# Altium PCB BottomBoard.PcbDoc (part 1 of 2)
Units mm, origin at the board's own origin, x right, y up, seen from the top; angles counter-clockwise.
Board outline 200 x 100 mm, 4 copper layers (Top Layer, Internal Plane 1, Internal Plane 2, Bottom Layer), stack 0.462 mm thick; 152 components, 162 nets, 488 pads, 15 vias.
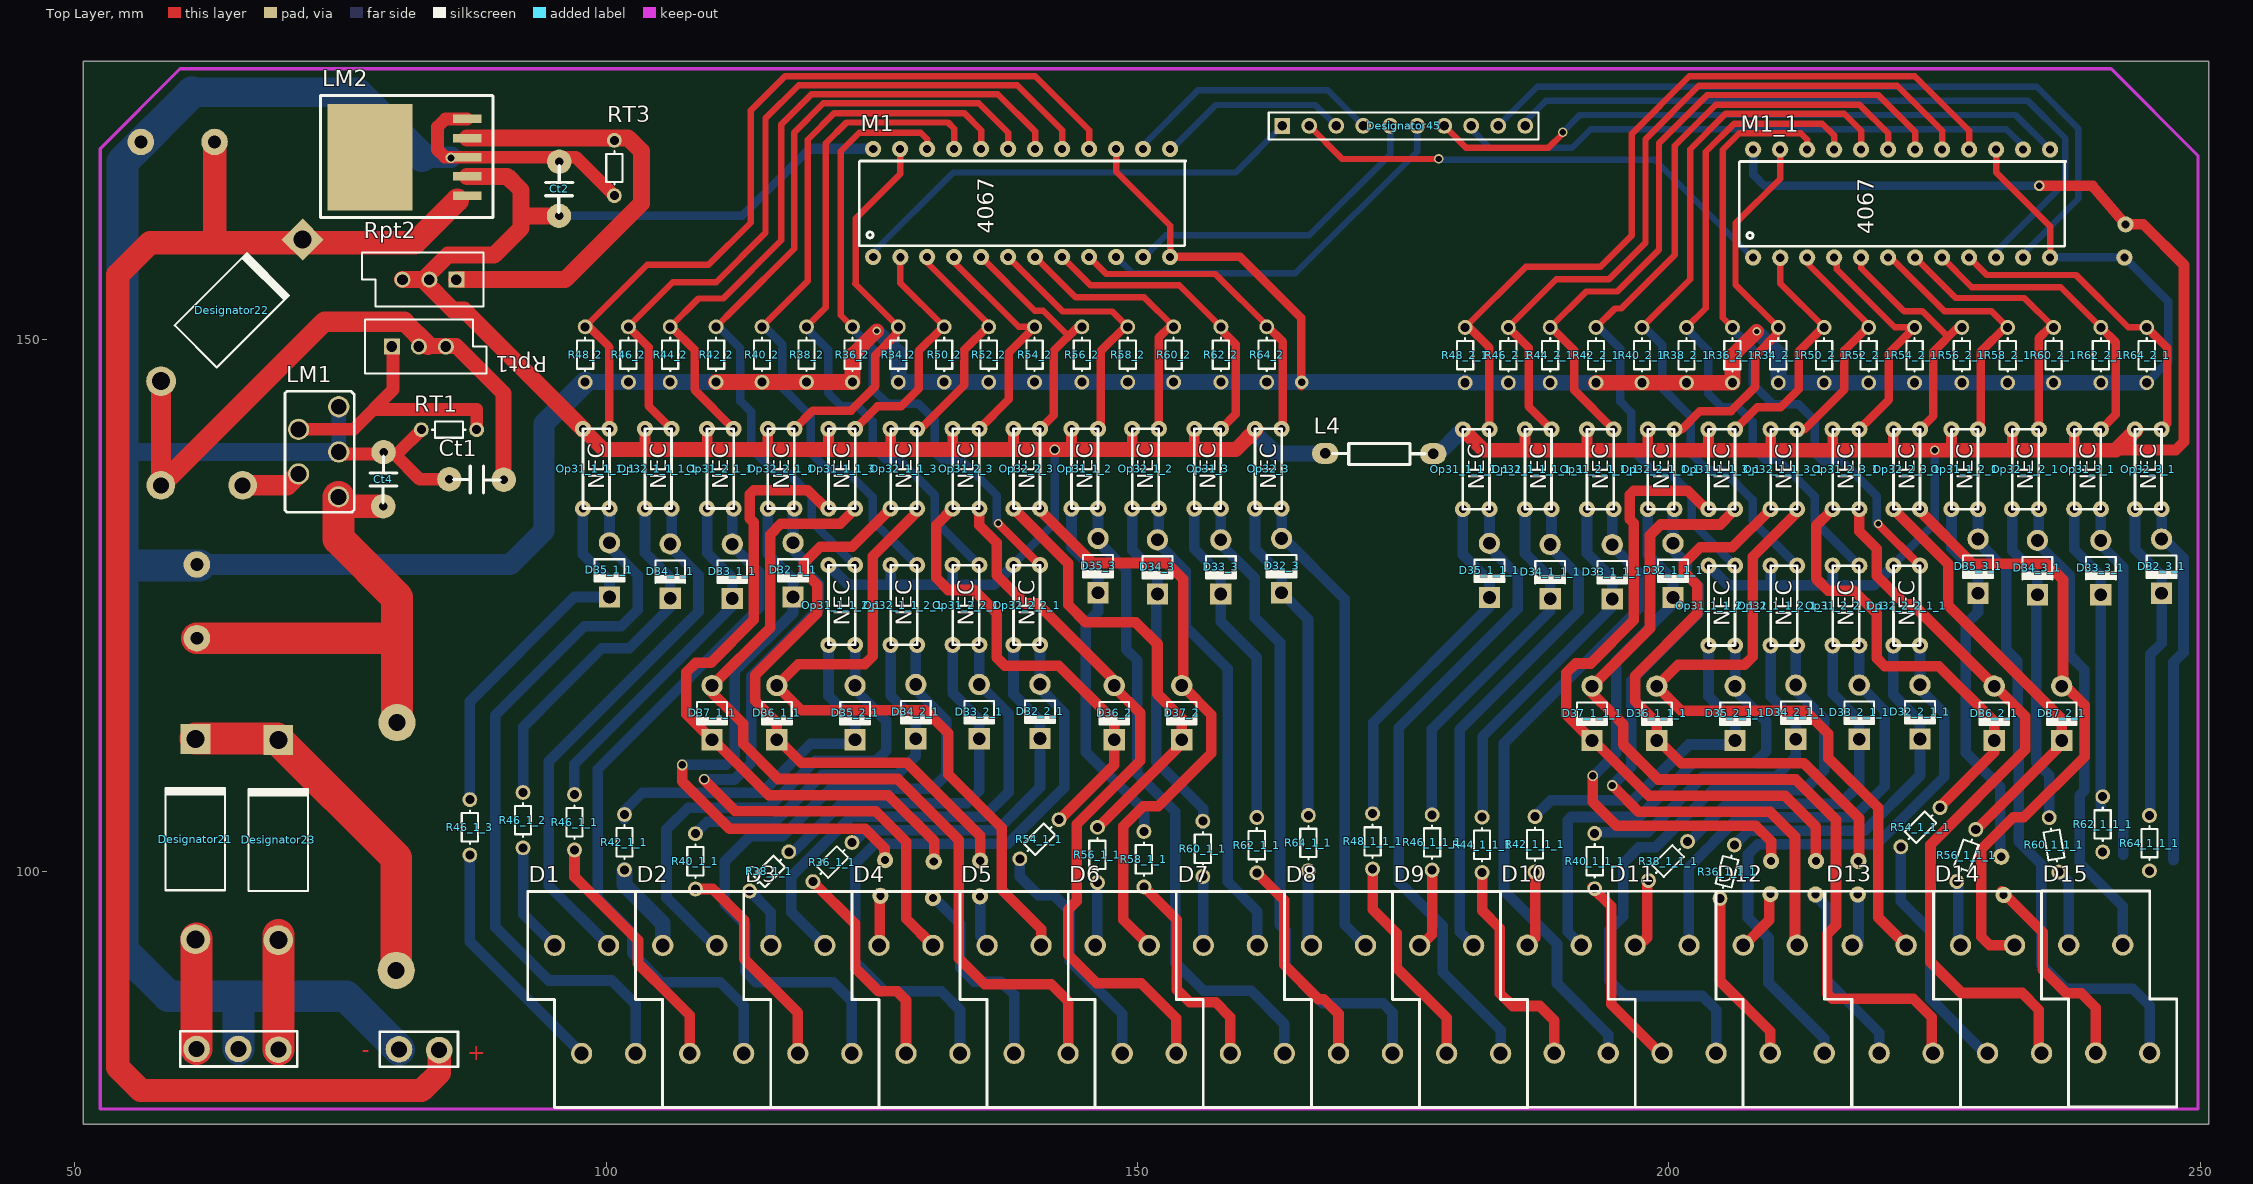
[diagram p0: Top Layer view]
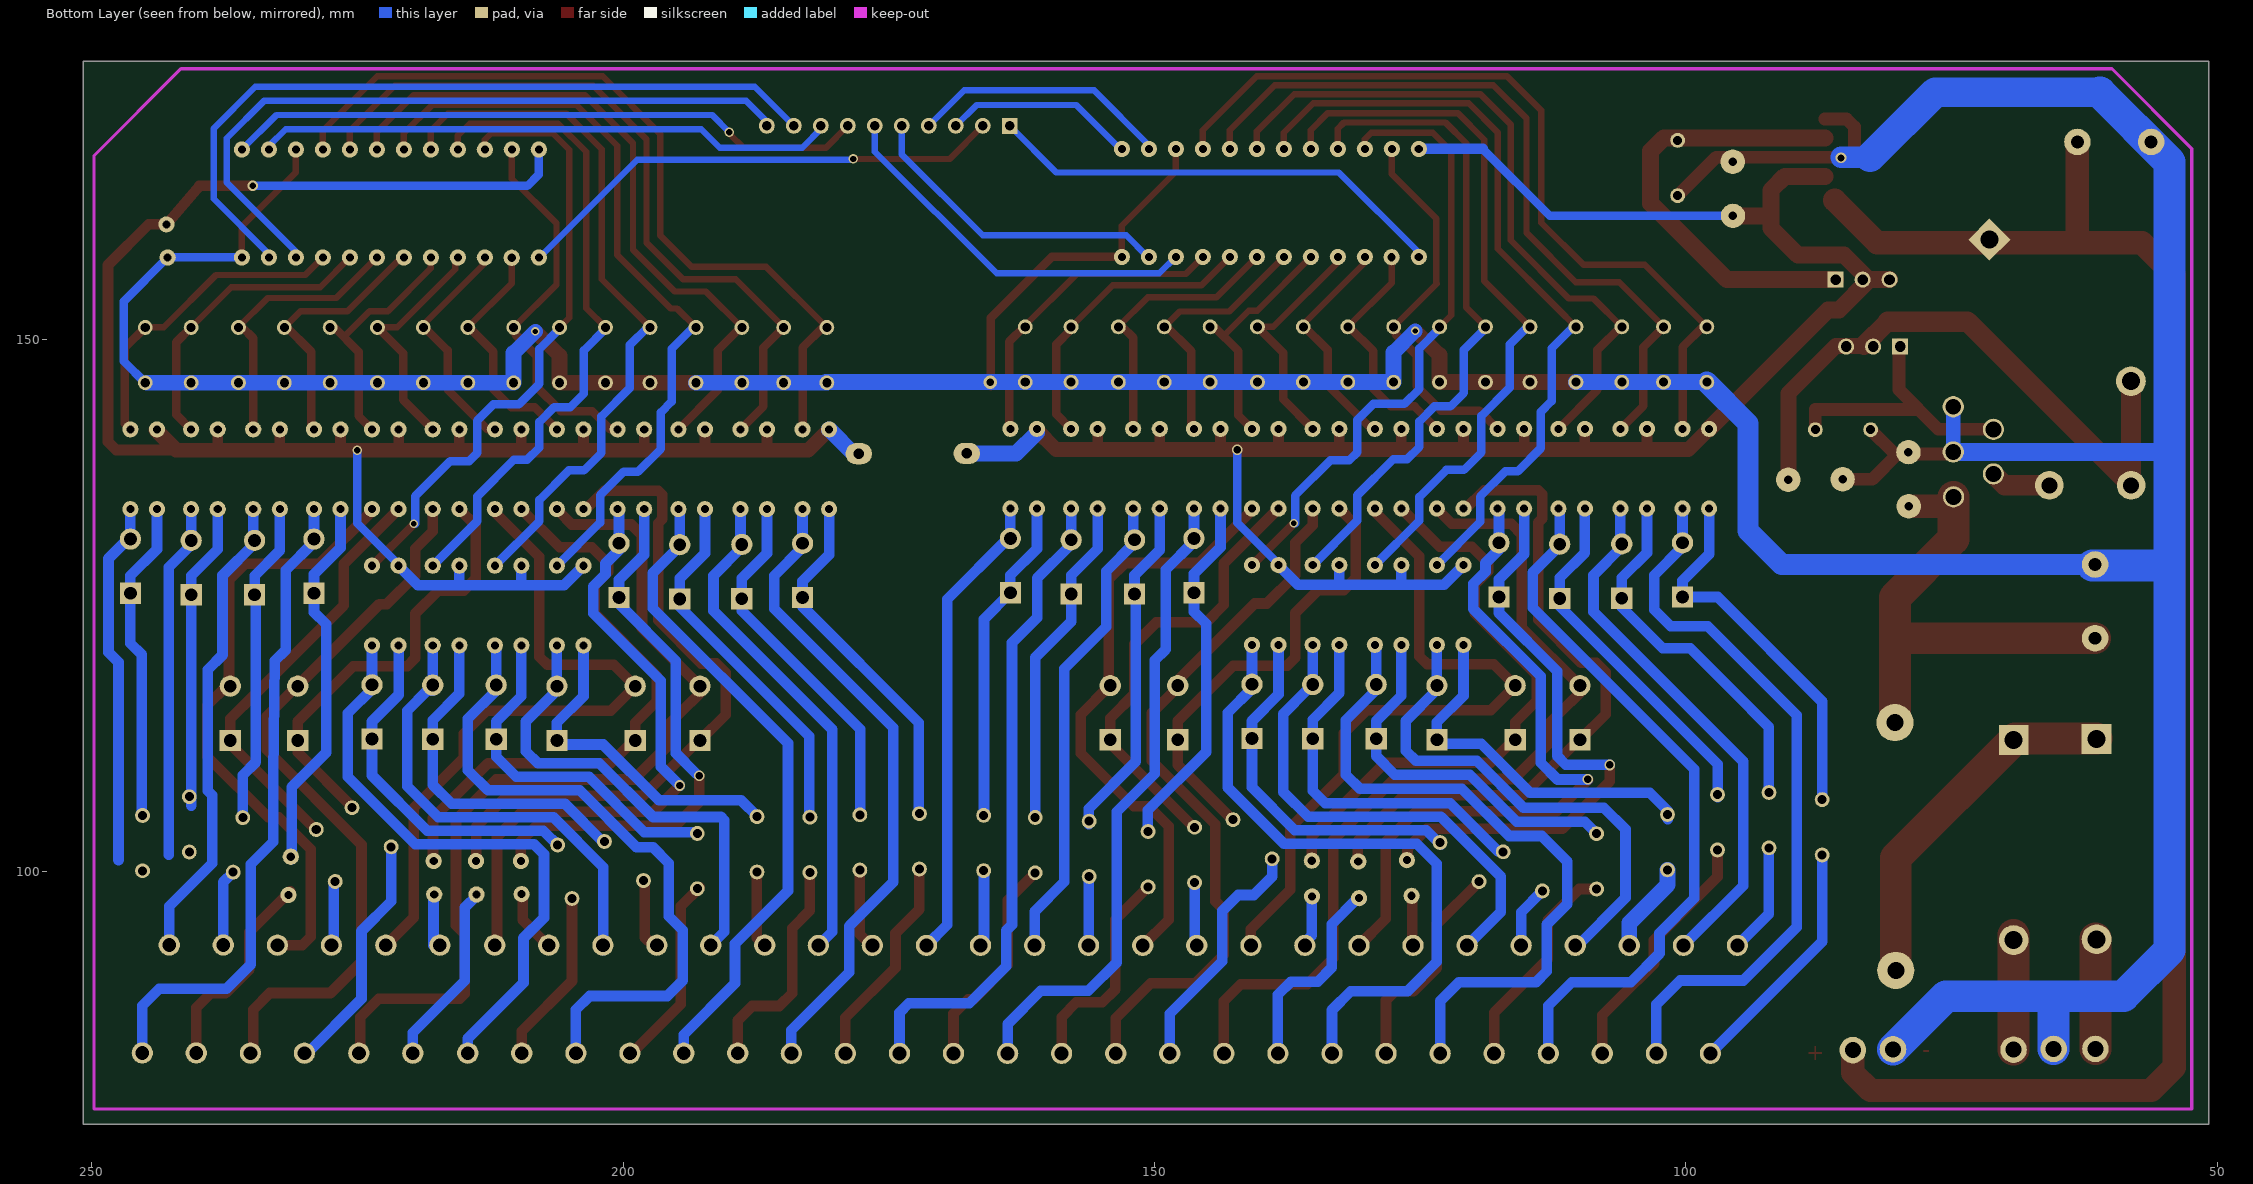
[diagram p1: Bottom Layer view, seen from below]
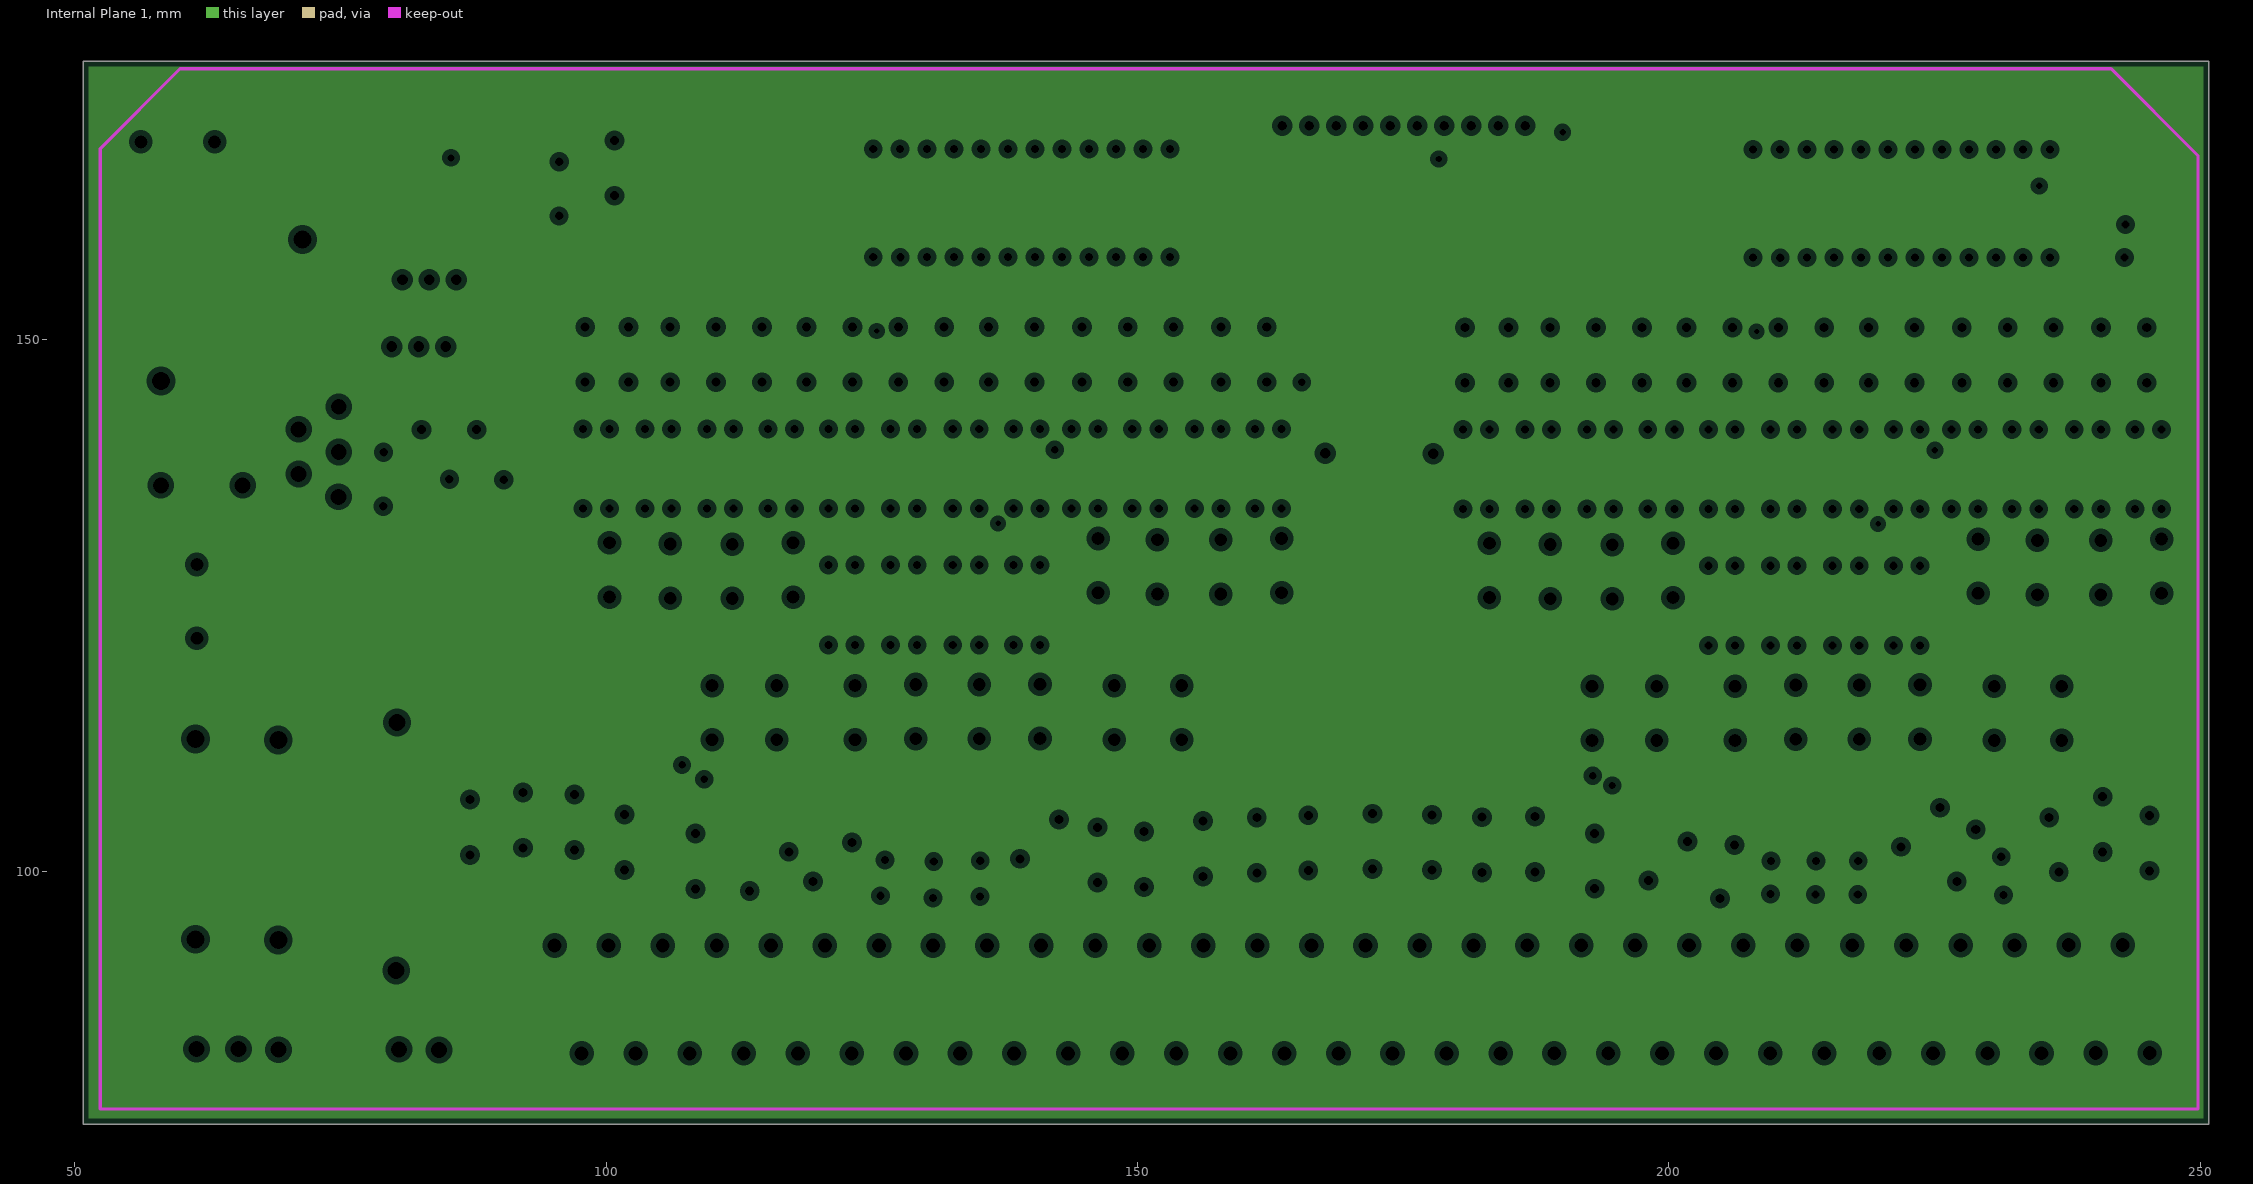
[diagram p2: Internal Plane 1, clearances drawn from the general rule]
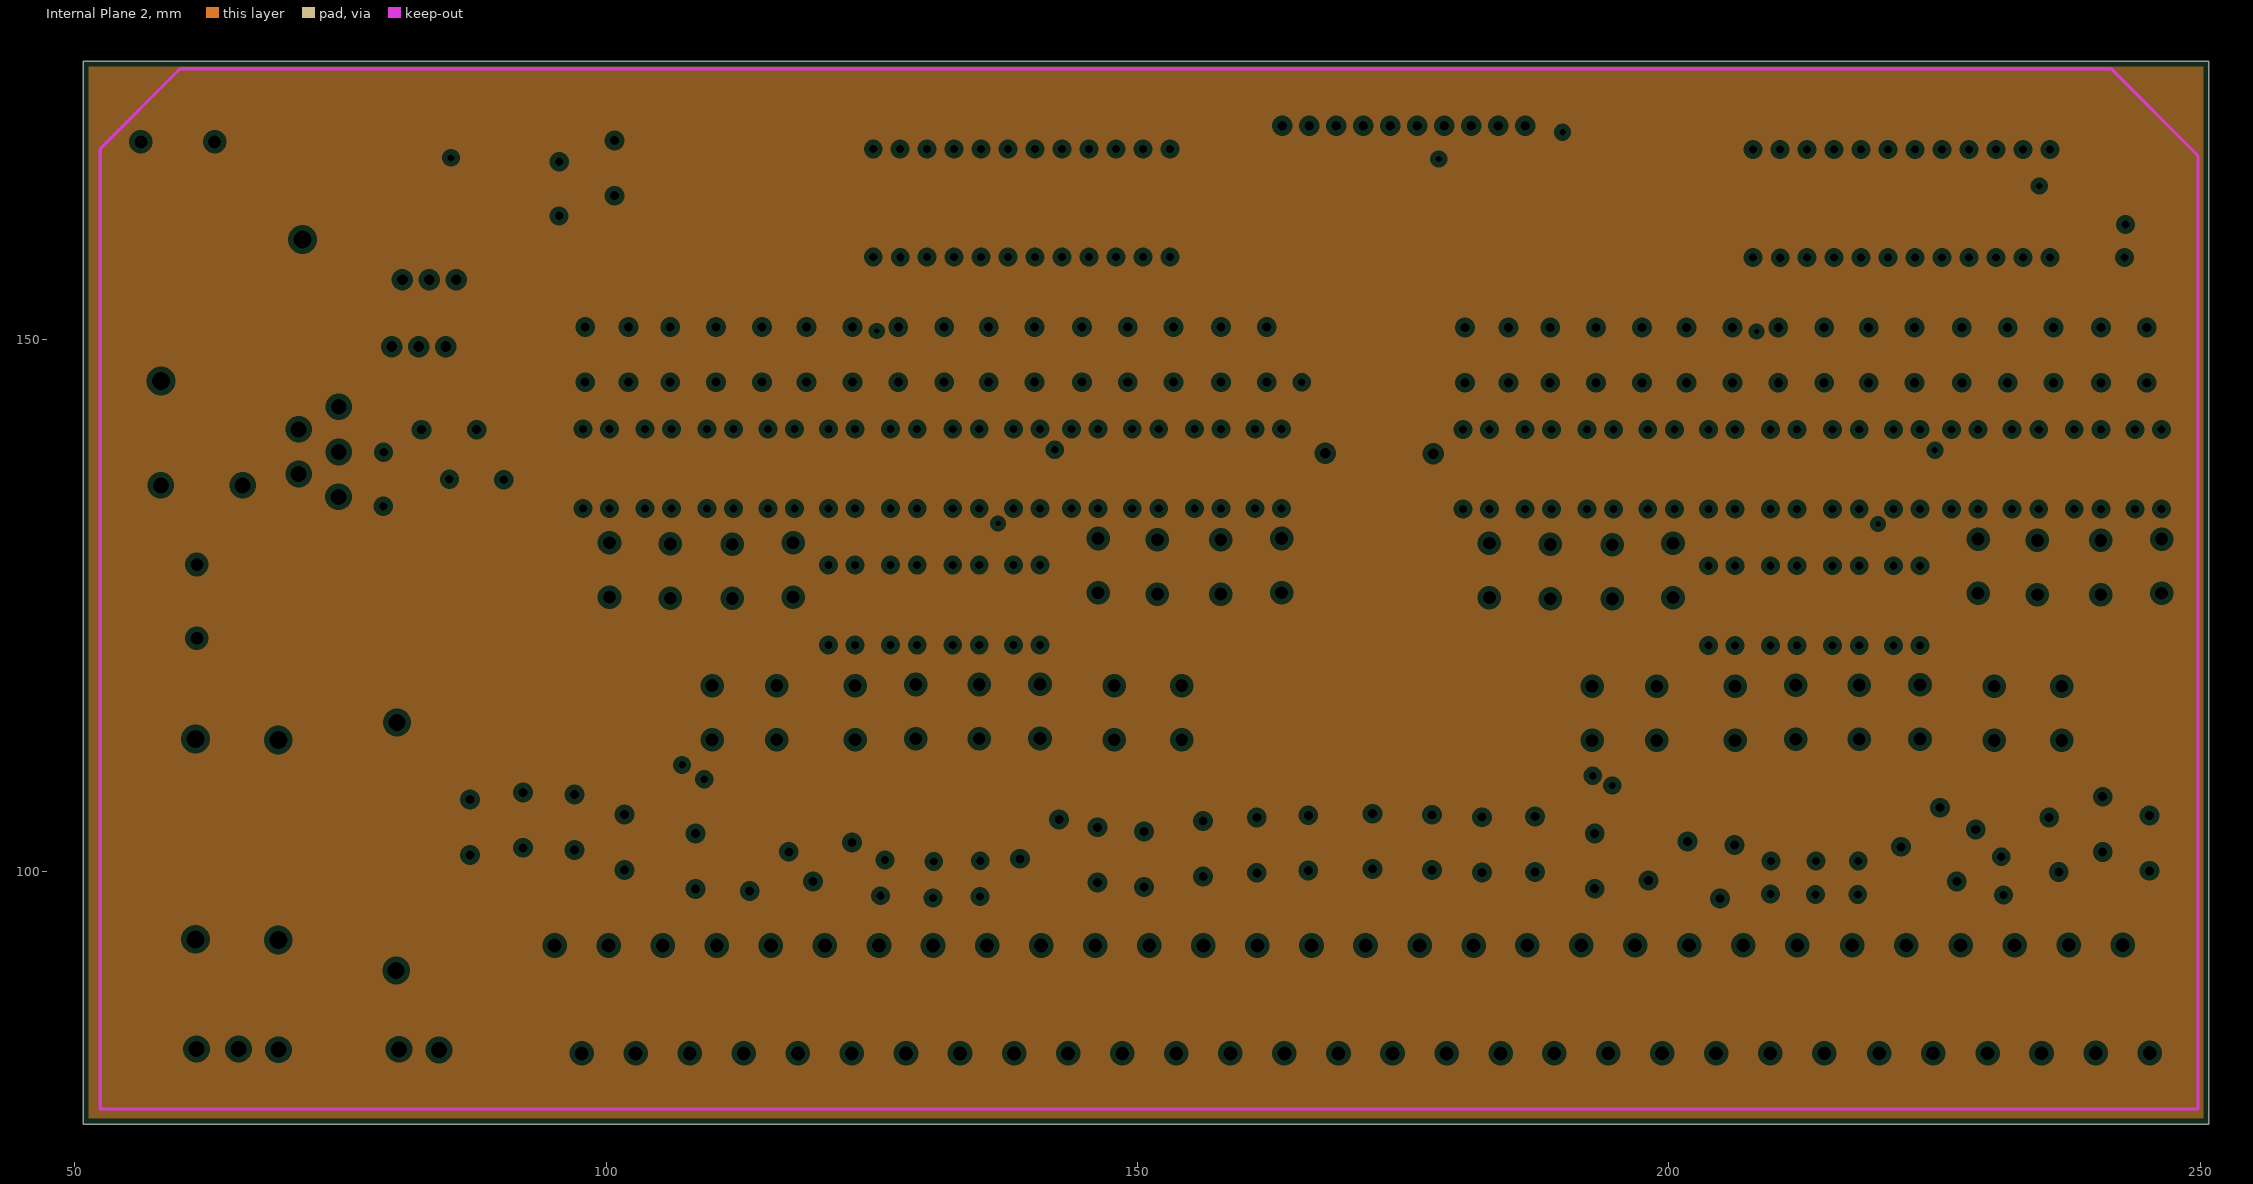
[diagram p3: Internal Plane 2, clearances drawn from the general rule]

## Layer stack, top to bottom
Top Solder: solder mask 0.0102, Solder Resist, Dk 3.5
Top Layer: signal copper 0.0356
Internal Plane 1: plane copper 0.0356
Internal Plane 2: plane copper 0.0356
Dielectric 1: dielectric 0.32, FR-4, Dk 4.8
Bottom Layer: signal copper 0.0356
Bottom Solder: solder mask 0.0102, Solder Resist, Dk 3.5

## Board outline
50.8,76.2 250.8,76.2 250.8,176.2 50.8,176.2

## Design rules (kind name [scope] priority, off if disabled: settings)
Clearance [All] p1: gap=0.2 ignorepadtopadclearanceinfootprint=FALSE
PlaneClearance [All] p1: clearance=0.508
PlaneConnect [All] p1: planeconnectstyle=Relief reliefexpansion=0.508 reliefentries=4 reliefconductorwidth=0.254 reliefairgap=0.254
PolygonConnect [All] p1: connectstyle=Relief reliefconductorwidth=0.254 reliefentries=4 polygonreliefangle="90 Angle" airgapwidth=0.254
RoutingVias [All] p1: holewidth=0.6 width=1 viastyle="Through Hole" minholewidth=0.711 minwidth=1.27 maxholewidth=0.711 maxwidth=1.27
SolderMaskExpansion [All] p1: expansion=0.102
Width [All] p1: maxlimit=0.2 minlimit=0.2 preferedwidth=0.2
28 further rules are at their usual default settings.

## Classes and differential pairs
component class MCU: Y1
component class GSM: C1 C2 R313 R323 RG1 RG2 RG3

## Components (designator, comment, footprint, x,y, rotation, side; value= is the part's Value field where it differs from the comment)
Ct1 "22pF" RAD_ADA 90.358,136.833 r180 top
Ct2 "22pF" RAD_ADA 95.565,161.649 r90 top
Ct4 "22pF" RAD_ADA 79.029,134.319 r90 top (schematic designator Ct2)
D1 "Comment" "Conector 4 Pin" 95.15,93 r0 top
D2 "Comment" "Conector 4 Pin" 105.325,93 r0 top
D3 "Comment" "Conector 4 Pin" 115.5,93 r0 top
D4 "Comment" "Conector 4 Pin" 125.675,93 r0 top
D5 "Comment" "Conector 4 Pin" 135.85,93 r0 top
D6 "Comment" "Conector 4 Pin" 146.025,93 r0 top
D7 "Comment" "Conector 4 Pin" 156.2,93 r0 top
D8 "Comment" "Conector 4 Pin" 166.375,93 r0 top
D9 "Comment" "Conector 4 Pin" 176.55,93 r0 top
D10 "Comment" "Conector 4 Pin" 186.675,93.025 r0 top
D11 "Comment" "Conector 4 Pin" 196.825,93.025 r0 top
D12 "Comment" "Conector 4 Pin" 207,93.025 r0 top
D13 "Comment" "Conector 4 Pin" 217.25,93.025 r0 top
D14 "Comment" "Conector 4 Pin" 227.45,93.025 r0 top
D15 "Comment" "Conector 4 Pin" 237.627,93.044 r0 top
D32_1_1 "Diode 1N4007 vertical" "D 50mm" 117.586,125.66 r270 top (schematic designator D32)
D32_1_1_1 "Diode 1N4007 vertical" "D 50mm" 200.39,125.609 r270 top (schematic designator D32)
D32_2_1 "Diode 1N4007 vertical" "D 50mm" 140.827,112.348 r270 top (schematic designator D32)
D32_2_1_1 "Diode 1N4007 vertical" "D 50mm" 223.631,112.297 r270 top (schematic designator D32)
D32_3 "Diode 1N4007 vertical" "D 50mm" 163.56,126.064 r270 top (schematic designator D32)
D32_3_1 "Diode 1N4007 vertical" "D 50mm" 246.364,126.013 r270 top (schematic designator D32)
D33_1_1 "Diode 1N4007 vertical" "D 50mm" 111.871,125.533 r270 top (schematic designator D32)
D33_1_1_1 "Diode 1N4007 vertical" "D 50mm" 194.675,125.482 r270 top (schematic designator D32)
D33_2_1 "Diode 1N4007 vertical" "D 50mm" 135.112,112.325 r270 top (schematic designator D32)
D33_2_1_1 "Diode 1N4007 vertical" "D 50mm" 217.916,112.274 r270 top (schematic designator D32)
D33_3 "Diode 1N4007 vertical" "D 50mm" 157.845,125.937 r270 top (schematic designator D32)
D33_3_1 "Diode 1N4007 vertical" "D 50mm" 240.649,125.886 r270 top (schematic designator D32)
D34_1_1 "Diode 1N4007 vertical" "D 50mm" 106.029,125.556 r270 top (schematic designator D32)
D34_1_1_1 "Diode 1N4007 vertical" "D 50mm" 188.833,125.505 r270 top (schematic designator D32)
D34_2_1 "Diode 1N4007 vertical" "D 50mm" 129.143,112.325 r270 top (schematic designator D32)
D34_2_1_1 "Diode 1N4007 vertical" "D 50mm" 211.947,112.274 r270 top (schematic designator D32)
D34_3 "Diode 1N4007 vertical" "D 50mm" 151.876,125.937 r270 top (schematic designator D32)
D34_3_1 "Diode 1N4007 vertical" "D 50mm" 234.68,125.886 r270 top (schematic designator D32)
D35_1_1 "Diode 1N4007 vertical" "D 50mm" 100.314,125.66 r270 top (schematic designator D32)
D35_1_1_1 "Diode 1N4007 vertical" "D 50mm" 183.118,125.609 r270 top (schematic designator D32)
D35_2_1 "Diode 1N4007 vertical" "D 50mm" 123.428,112.221 r270 top (schematic designator D32)
D35_2_1_1 "Diode 1N4007 vertical" "D 50mm" 206.232,112.17 r270 top (schematic designator D32)
D35_3 "Diode 1N4007 vertical" "D 50mm" 146.288,126.064 r270 top (schematic designator D32)
D35_3_1 "Diode 1N4007 vertical" "D 50mm" 229.092,126.013 r270 top (schematic designator D32)
D36_1_1 "Diode 1N4007 vertical" "D 50mm" 116.062,112.221 r270 top (schematic designator D32)
D36_1_1_1 "Diode 1N4007 vertical" "D 50mm" 198.866,112.17 r270 top (schematic designator D32)
D36_2 "Diode 1N4007 vertical" "D 50mm" 147.812,112.221 r270 top (schematic designator D32)
D36_2_1 "Diode 1N4007 vertical" "D 50mm" 230.616,112.17 r270 top (schematic designator D32)
D37_1_1 "Diode 1N4007 vertical" "D 50mm" 109.966,112.221 r270 top (schematic designator D32)
D37_1_1_1 "Diode 1N4007 vertical" "D 50mm" 192.77,112.17 r270 top (schematic designator D32)
D37_2 "Diode 1N4007 vertical" "D 50mm" 154.162,112.221 r270 top (schematic designator D32)
D37_2_1 "Diode 1N4007 vertical" "D 50mm" 236.966,112.17 r270 top (schematic designator D32)
Designator21 "Comment" DO-201AD 61.35,103 r90 top
Designator22 "Comment" DO-201AD 64.78,152.759 r45 top
Designator23 "Comment" DO-201AD 69.15,102.925 r90 top
Designator45 "Comment" HDR1X10 163.618,170.126 r0 top
L4 "Ferrite-bead" Ferrite-bead 177.825,139.275 r0 top (schematic designator L2)
LM1 "LM2596T" LM2596T 74.838,143.717 r270 top
LM2 "LM2596T" "LM2596T SMD" 86.929,163.554 r90 top
M1 "Multiplexer_4067" Multiplexer_4067 125.13,157.788 r90 top (schematic designator M2)
M1_1 "Multiplexer_4067" Multiplexer_4067 207.934,157.737 r90 top (schematic designator M2)
Op31_1_1_1_1 "NEC_Opto" NEC_Optocupler 100.314,129.112 r90 top (schematic designator Op31)
Op31_1_1_1_1_1 "NEC_Opto" NEC_Optocupler 183.118,129.061 r90 top (schematic designator Op31)
Op31_1_1_2_1 "NEC_Opto" NEC_Optocupler 123.428,116.285 r90 top (schematic designator Op31)
Op31_1_1_2_1_1 "NEC_Opto" NEC_Optocupler 206.232,116.234 r90 top (schematic designator Op31)
Op31_1_1_3 "NEC_Opto" NEC_Optocupler 123.428,129.112 r90 top (schematic designator Op31)
Op31_1_1_3_1 "NEC_Opto" NEC_Optocupler 206.232,129.061 r90 top (schematic designator Op31)
Op31_1_2 "NEC_Opto" NEC_Optocupler 146.288,129.112 r90 top (schematic designator Op31)
Op31_1_2_1 "NEC_Opto" NEC_Optocupler 229.092,129.061 r90 top (schematic designator Op31)
Op31_2_1_1 "NEC_Opto" NEC_Optocupler 111.998,129.112 r90 top (schematic designator Op31)
Op31_2_1_1_1 "NEC_Opto" NEC_Optocupler 194.802,129.061 r90 top (schematic designator Op31)
Op31_2_2_1 "NEC_Opto" NEC_Optocupler 135.112,116.285 r90 top (schematic designator Op31)
Op31_2_2_1_1 "NEC_Opto" NEC_Optocupler 217.916,116.234 r90 top (schematic designator Op31)
Op31_2_3 "NEC_Opto" NEC_Optocupler 135.112,129.112 r90 top (schematic designator Op31)
Op31_2_3_1 "NEC_Opto" NEC_Optocupler 217.916,129.061 r90 top (schematic designator Op31)
Op31_3 "NEC_Opto" NEC_Optocupler 157.845,129.112 r90 top (schematic designator Op31)
Op31_3_1 "NEC_Opto" NEC_Optocupler 240.649,129.061 r90 top (schematic designator Op31)
Op32_1_1_1_1 "NEC_Opto" NEC_Optocupler 106.156,129.112 r90 top (schematic designator Op31)
Op32_1_1_1_1_1 "NEC_Opto" NEC_Optocupler 188.96,129.061 r90 top (schematic designator Op31)
Op32_1_1_2_1 "NEC_Opto" NEC_Optocupler 129.27,116.285 r90 top (schematic designator Op31)
Op32_1_1_2_1_1 "NEC_Opto" NEC_Optocupler 212.074,116.234 r90 top (schematic designator Op31)
Op32_1_1_3 "NEC_Opto" NEC_Optocupler 129.27,129.112 r90 top (schematic designator Op31)
Op32_1_1_3_1 "NEC_Opto" NEC_Optocupler 212.074,129.061 r90 top (schematic designator Op31)
Op32_1_2 "NEC_Opto" NEC_Optocupler 152.003,129.112 r90 top (schematic designator Op31)
Op32_1_2_1 "NEC_Opto" NEC_Optocupler 234.807,129.061 r90 top (schematic designator Op31)
Op32_2_1_1 "NEC_Opto" NEC_Optocupler 117.713,129.112 r90 top (schematic designator Op31)
Op32_2_1_1_1 "NEC_Opto" NEC_Optocupler 200.517,129.061 r90 top (schematic designator Op31)
Op32_2_2_1 "NEC_Opto" NEC_Optocupler 140.827,116.285 r90 top (schematic designator Op31)
Op32_2_2_1_1 "NEC_Opto" NEC_Optocupler 223.631,116.234 r90 top (schematic designator Op31)
Op32_2_3 "NEC_Opto" NEC_Optocupler 140.827,129.112 r90 top (schematic designator Op31)
Op32_2_3_1 "NEC_Opto" NEC_Optocupler 223.631,129.061 r90 top (schematic designator Op31)
Op32_3 "NEC_Opto" NEC_Optocupler 163.56,129.112 r90 top (schematic designator Op31)
Op32_3_1 "NEC_Opto" NEC_Optocupler 246.364,129.061 r90 top (schematic designator Op31)
R34_2 "Resistor vertical" Res50 127.492,149.813 r90 top (schematic designator R34)
R34_2_1 "Resistor vertical" Res50 210.296,149.762 r90 top (schematic designator R34)
R36_1_1 "Resistor vertical" Res50 122.15,101.7 r45 top (schematic designator R36)
R36_1_1_1 "Resistor vertical" Res50 205.8,101.1 r75 top (schematic designator R36)
R36_2 "Resistor vertical" Res50 123.174,149.813 r90 top (schematic designator R36)
R36_2_1 "Resistor vertical" Res50 205.978,149.762 r90 top (schematic designator R36)
R38_1_1 "Resistor vertical" Res50 116.2,100.825 r45 top (schematic designator R38)
R38_1_1_1 "Resistor vertical" Res50 200.775,101.8 r45 top (schematic designator R38)
R38_2 "Resistor vertical" Res50 118.856,149.813 r90 top (schematic designator R38)
R38_2_1 "Resistor vertical" Res50 201.66,149.762 r90 top (schematic designator R38)
R40_1_1 "Resistor vertical" Res50 108.4,102.125 r90 top (schematic designator R40)
R40_1_1_1 "Resistor vertical" Res50 193.025,102.15 r90 top (schematic designator R40)
R40_2 "Resistor vertical" Res50 114.665,149.813 r90 top (schematic designator R40)
R40_2_1 "Resistor vertical" Res50 197.469,149.762 r90 top (schematic designator R40)
R42_1_1 "Resistor vertical" Res50 101.725,103.925 r90 top (schematic designator R42)
R42_1_1_1 "Resistor vertical" Res50 187.4,103.725 r90 top (schematic designator R42)
R42_2 "Resistor vertical" Res50 110.347,149.813 r90 top (schematic designator R42)
R42_2_1 "Resistor vertical" Res50 193.151,149.762 r90 top (schematic designator R42)
R44_1_1_1 "Resistor vertical" Res50 182.425,103.675 r90 top (schematic designator R44)
R44_2 "Resistor vertical" Res50 106.029,149.813 r90 top (schematic designator R44)
R44_2_1 "Resistor vertical" Res50 188.833,149.762 r90 top (schematic designator R44)
R46_1_1 "Resistor vertical" Res50 97.025,105.8 r90 top (schematic designator R46)
R46_1_1_1 "Resistor vertical" Res50 177.725,103.9 r90 top (schematic designator R46)
R46_1_2 "Resistor vertical" Res50 92.175,106 r90 top (schematic designator R46)
R46_1_3 "Resistor vertical" Res50 87.175,105.325 r90 top (schematic designator R46)
R46_2 "Resistor vertical" Res50 102.092,149.813 r90 top (schematic designator R46)
R46_2_1 "Resistor vertical" Res50 184.896,149.762 r90 top (schematic designator R46)
R48_1_1_1 "Resistor vertical" Res50 172.125,104 r90 top (schematic designator R48)
R48_2 "Resistor vertical" Res50 98.028,149.813 r90 top (schematic designator R48)
R48_2_1 "Resistor vertical" Res50 180.832,149.762 r90 top (schematic designator R48)
R50_2 "Resistor vertical" Res50 131.81,149.813 r90 top (schematic designator R50)
R50_2_1 "Resistor vertical" Res50 214.614,149.762 r90 top (schematic designator R50)
R52_2 "Resistor vertical" Res50 136.001,149.813 r90 top (schematic designator R52)
R52_2_1 "Resistor vertical" Res50 218.805,149.762 r90 top (schematic designator R52)
R54_1_1 "Resistor vertical" Res50 141.625,103.85 r45 top (schematic designator R54)
R54_1_1_1 "Resistor vertical" Res50 224.525,104.975 r45 top (schematic designator R54)
R54_2 "Resistor vertical" Res50 140.319,149.813 r90 top (schematic designator R54)
R54_2_1 "Resistor vertical" Res50 223.123,149.762 r90 top (schematic designator R54)
R56_1_1 "Resistor vertical" Res50 146.225,102.725 r90 top (schematic designator R56)
R56_1_1_1 "Resistor vertical" Res50 228.4,102.6 r70 top (schematic designator R56)
R56_2 "Resistor vertical" Res50 144.764,149.813 r90 top (schematic designator R56)
R56_2_1 "Resistor vertical" Res50 227.568,149.762 r90 top (schematic designator R56)
R58_1_1 "Resistor vertical" Res50 150.6,102.325 r90 top (schematic designator R58)
R58_2 "Resistor vertical" Res50 149.082,149.813 r90 top (schematic designator R58)
R58_2_1 "Resistor vertical" Res50 231.886,149.762 r90 top (schematic designator R58)
R60_1_1 "Resistor vertical" Res50 156.15,103.3 r90 top (schematic designator R60)
R60_1_1_1 "Resistor vertical" Res50 236.45,101.275 r280 top (schematic designator R60)
R60_2 "Resistor vertical" Res50 153.4,149.813 r90 top (schematic designator R60)
R60_2_1 "Resistor vertical" Res50 236.204,149.762 r90 top (schematic designator R60)
R62_1_1 "Resistor vertical" Res50 161.224,103.65 r90 top (schematic designator R62)
R62_1_1_1 "Resistor vertical" Res50 240.825,105.6 r90 top (schematic designator R62)
R62_2 "Resistor vertical" Res50 157.845,149.813 r90 top (schematic designator R62)
R62_2_1 "Resistor vertical" Res50 240.649,149.762 r90 top (schematic designator R62)
R64_1_1 "Resistor vertical" Res50 166.075,103.85 r90 top (schematic designator R64)
R64_1_1_1 "Resistor vertical" Res50 245.221,103.839 r90 top (schematic designator R64)
R64_2 "Resistor vertical" Res50 162.163,149.813 r90 top (schematic designator R64)
R64_2_1 "Resistor vertical" Res50 244.967,149.762 r90 top (schematic designator R64)
Rpt1 "RPot" VR5 82.382,149.355 r0 top
Rpt2 "RPot" VR5 83.373,155.655 r180 top
RT1 "Resistor vertical" Res50 84.008,141.532 r180 top
RT3 "Resistor vertical" Res50 100.772,167.364 r90 top (schematic designator RT2)

## Footprints (in the part's own frame and the unit in brackets; to place one, negate y for a bottom-side part, rotate by r counter-clockwise, add the part's x,y. Pads: shape width x height; smd on the part's side, far side on the other; paste and mask are expansions set on the pad)
"Conector 4 Pin" [mm]
  round 2 hole 1.3: 0(0,0) 1(5.08,0) 2(2.54,-10.16) 3(7.62,-10.16)
  silkscreen extent -2.54,-15.24 10.16,5.08
"D 50mm" [mm] "50mm Pin Spacing"
  round 2 hole 1.2: 1(-5.23,0)
  rect 2x2 hole 1.2: 2(-0.127,0)
  silkscreen extent -3.68,-1.4 -1.49,1.4
DO-201AD [mm] "Diode, Axial; Body 9.5 x 5.6 mm (LxDia. max), Lead Dia. 1.32 mm (max)"
  round 2.8 hole 1.7: 1(-9.42,0)
  rect 2.8x2.8 hole 1.7: 2(9.42,0)
  silkscreen extent -4.8,-2.8 4.9,2.8
Ferrite-bead [mm]
  oval 2.5x2 hole 1: 1(0,0) 2(-10.16,0.025)
  silkscreen extent -9.45,-1.02 -0.79,0.96
HDR1X10 [mm] "Connector; Header; 10 Position"
  rect 1.5x1.5 hole 0.9: 1(0,0)
  round 1.5 hole 0.9: 2(2.54,0) 3(5.08,0) 4(7.62,0) 5(10.16,0) 6(12.7,0) 7(15.24,0) 8(17.78,0) 9(20.32,0) 10(22.86,0)
  silkscreen extent -1.27,-1.27 24.13,1.27
LM2596T [mm]
  round 2 hole 1.5: 0(8.5,-0.025) 1(6.35,-3.775) 2(4.275,0) 3(2.15,-3.775) 4(0.025,0)
  silkscreen extent -1.43,-5.05 9.95,1.45
"LM2596T SMD" [mm]
  rect 0.8x2.7 smd: 0(0,0) 1(1.825,0) 2(3.625,0) 3(5.425,0) 4(7.225,0)
  rect 10x8 smd: 5(3.625,9.15)
  silkscreen extent -2.05,-2.42 9.43,13.8
Multiplexer_4067 [mil]
  round 60 hole 30: 0(0,0) 1(-0.98,-100.39) 2(0,-200) 3(0,-300) 4(0,-400) 5(0,-500) 6(0,-600) 7(0,-700) 8(0,-800) 9(0,-900) 10(0,-1000) 11(0,-1100) 14(400,-1100) 15(400,-1000) 16(400,-900) 17(400,-800) 18(400,-700) 19(400,-600) 20(400,-500) 21(400,-400) 22(400,-300) 23(400,-200) 24(400,-100) 25(400,0)
  silkscreen extent 41,-1157 355,51
NEC_Optocupler [mil]
  round 60 hole 30: 0(196.85,98.43) 1(196.85,0) 2(492.13,98.43) 3(492.13,0)
  silkscreen extent 197,0 492,98
RAD_ADA [mm]
  round 2.3 hole 0.8: 1(0,0) 2(5.105,-0.026)
  silkscreen extent 0.33,-1.3 4.72,1.24
Res50 [mm] "50mm Pin Spacing"
  round 1.4 hole 0.85: 1(-3.81,0) 2(1.397,0)
  silkscreen extent -2.77,-0.76 0.38,0.76
VR5 [mm] "Thru-Hole; 3 Leads"
  rect 1.5x1.5 hole 1: 1(-2.54,0)
  round 1.5 hole 1: 2(0,0) 3(2.54,0)
  silkscreen extent -5.08,-2.54 6.35,2.54

## Part data
Ct1 Ct2 Ct4: library part "Cap Semi_1", "Capacitor (Semiconductor SIM Model)"
D32_1_1 D32_1_1_1 D32_2_1 D32_2_1_1 D32_3 D32_3_1 D33_1_1 D33_1_1_1 D33_2_1 D33_2_1_1 D33_3 D33_3_1 D34_1_1 D34_1_1_1 D34_2_1 D34_2_1_1 D34_3 D34_3_1 D35_1_1 D35_1_1_1 D35_2_1 D35_2_1_1 D35_3 D35_3_1 D36_1_1 D36_1_1_1 D36_2 D36_2_1 D37_1_1 D37_1_1_1 D37_2 D37_2_1: "1 Amp General Purpose Rectifier"
R34_2 R34_2_1 R36_1_1 R36_1_1_1 R36_2 R36_2_1 R38_1_1 R38_1_1_1 R38_2 R38_2_1 R40_1_1 R40_1_1_1 R40_2 R40_2_1 R42_1_1 R42_1_1_1 R42_2 R42_2_1 R44_1_1_1 R44_2 R44_2_1 R46_1_1 R46_1_1_1 R46_1_2 R46_1_3 R46_2 R46_2_1 R48_1_1_1 R48_2 R48_2_1 R50_2 R50_2_1 R52_2 R52_2_1 R54_1_1 R54_1_1_1 R54_2 R54_2_1 R56_1_1 R56_1_1_1 R56_2 R56_2_1 R58_1_1 R58_2 R58_2_1 R60_1_1 R60_1_1_1 R60_2 R60_2_1 R62_1_1 R62_1_1_1 R62_2 R62_2_1 R64_1_1 R64_1_1_1 R64_2 R64_2_1 RT1 RT3: "Resistor 0.5"
Rpt1 Rpt2: "Potentiometer"

## Free pads (board coordinates)
  round 2.5 hole 1.2: 0(56.22,168.609) 0(61.493,121.913) 1(61.493,128.847) 1(63.154,168.609)
  round 1.524 hole 0.762: 0(242.859,157.737) 2(242.975,160.85) 6(231.275,101.35) 7(231.5,97.75) 8(209.625,100.95) 9(213.85,100.95) 10(217.825,100.95) 11(217.775,97.8) 12(213.8,97.8) 13(209.55,97.825) 14(126.25,101.025) 15(125.8,97.675) 16(130.75,97.45) 17(130.825,100.9) 18(135.2,100.975) 19(135.175,97.625)
  round 3.5 hole 1.6: 2(80.248,90.656) 2(80.325,113.975)
  round 2.7 hole 1.5: 3(58.1,136.3) 3(65.796,136.3)
  round 2.5 hole 1.5: 3(61.458,83.264) 5(65.395,83.264) 5(69.165,83.192) 5(80.512,83.228) 5(84.282,83.156)

## Via types
v1: diameter 1, hole 0.7, Top Layer to Bottom Layer, 5 vias
v2: diameter 0.8, hole 0.5, Top Layer to Bottom Layer, 4 vias
v3: diameter 0.9, hole 0.6, Top Layer to Bottom Layer, 3 vias
v4: diameter 1, hole 0.65, Top Layer to Bottom Layer, 1 vias
v5: diameter 1.27, hole 0.711, Top Layer to Bottom Layer, 1 vias
v6: diameter 1, hole 0.6, Top Layer to Bottom Layer, 1 vias

## Nets (pads, with @x,y where several pads share a name; then routed paths per layer and width w, separated by ;. In a path a pad name is that pad's centre, name@x,y a point inside that pad or via, vN(x,y) a via of type N, cw(c..) or ccw(c..) an arc to the next point about the centre after c; other vN are vias at no path point)
NetANT_1: 
NetANT_2: 
NetBT1_0: 
NetBuzzer_1: 
NetBuzzer_2: 
NetC1_1: 
NetC2_2: 
NetC_0: 
NetC_1: 
NetCon1_1: 
NetCon1_2: 
NetCon1_4: 
NetCt1_2: 
NetCt3_2: 
NetD2_1: 
NetD2_2: 
NetD3_1: 
NetD3_2: 
NetD4_1: 
NetD4_2: 
NetD5_1: 
NetD5_2: 
NetD6_1: 
NetD6_2: 
NetD7_1: 
NetD7_2: 
NetD8_1: 
NetD8_2: 
NetD9_1: 
NetD9_2: 
NetD10_1: 
NetD10_2: 
NetD11_1: 
NetD11_2: 
NetD12_1: 
NetD12_2: 
NetD13_1: 
NetD13_2: 
NetD14_1: 
NetD14_2: 
NetD15_1: 
NetD15_2: 
NetD16_1: 
NetD16_2: 
NetD17_1: 
NetD17_2: 
NetD18_1: 
NetD18_2: 
NetD19_1: 
NetD19_2: 
NetD20_1: 
NetD20_2: 
NetD21_1: 
NetD21_2: 
NetD22_1: 
NetD22_2: 
NetD23_1: 
NetD23_2: 
NetD24_1: 
NetD24_2: 
NetD25_1: 
NetD25_2: 
NetD26_1: 
NetD26_2: 
NetD27_1: 
NetD27_2: 
NetD28_1: 
NetD28_2: 
NetD29_1: 
NetD29_2: 
NetD30_1: 
NetD30_2: 
NetD31_1: 
NetD31_2: 
NetD32_1: 
NetD32_2: 
NetD33_2: 
NetD34_2: 
NetDi1_1: 
NetDi1_2: 
NetDt2_1: 
NetL1_2: 
NetL2_1: 
NetLCD_0: 
NetLCD_1: 
NetLCD_2: 
NetLCD_3: 
NetLCD_4: 
NetLCD_5: 
NetLCD_10: 
NetLCD_11: 
NetLCD_12: 
NetLCD_13: 
NetLCD_15: 
NetLED1_1: 
NetLED1_2: 
NetLED2_1: 
NetLM1_3: 
NetLM2_3: 
NetM1_1: 
NetM1_2: 
NetM1_3: 
NetM1_4: 
NetM1_5: 
NetM1_6: 
NetM1_7: 
NetM1_8: 
NetM1_15: 
NetM1_16: 
NetM1_17: 
NetM1_18: 
NetM1_19: 
NetM1_20: 
NetM1_21: 
NetM1_22: 
NetM2_1: 
NetM2_2: 
NetM2_3: 
NetM2_4: 
NetM2_5: 
NetM2_6: 
NetM2_7: 
NetM2_8: 
NetM2_15: 
NetM2_16: 
NetM2_17: 
NetM2_18: 
NetM2_19: 
NetM2_20: 
NetM2_21: 
NetM2_22: 
NetQ1_B: 
NetQ1_C: 
NetQL1_B: 
NetREL1_2: 
NetREL2_2: 
NetREL3_2: 
NetREL4_2: 
NetREL5_2: 
NetREL6_2: 
NetREL7_2: 
NetREL8_2: 
NetREL9_2: 
NetREL10_2: 
NetRG2_1: 
NetRG3_2: 
NetS1_0: 
NetS1_1: 
NetU1_4: 
NetU1_19: 
NetU1_23: 
NetU1_24: 
NetU1_25: 
NetU1_26: 
NetU1_27: 
NetU1_28: 
NetU1_29: 
NetU1_30: 
NetU1_31: 
NetU1_32: 
NetU1_33: 
NetU1_34: 
pads on no net: Ct1.1 Ct1.2 Ct2.1 Ct2.2 Ct4.1 Ct4.2 D1.0 D1.1 D1.2 D1.3 D2.0 D2.1 D2.2 D2.3 D3.0 D3.1 D3.2 D3.3 D4.0 D4.1 D4.2 D4.3 D5.0 D5.1 D5.2 D5.3 D6.0 D6.1 D6.2 D6.3 D7.0 D7.1 D7.2 D7.3 D8.0 D8.1 D8.2 D8.3 D9.0 D9.1 D9.2 D9.3 D10.0 D10.1 D10.2 D10.3 D11.0 D11.1 D11.2 D11.3 D12.0 D12.1 D12.2 D12.3 D13.0 D13.1 D13.2 D13.3 D14.0 D14.1 D14.2 D14.3 D15.0 D15.1 D15.2 D15.3 D32_1_1.1 D32_1_1.2 D32_1_1_1.1 D32_1_1_1.2 D32_2_1.1 D32_2_1.2 D32_2_1_1.1 D32_2_1_1.2 D32_3.1 D32_3.2 D32_3_1.1 D32_3_1.2 D33_1_1.1 D33_1_1.2 D33_1_1_1.1 D33_1_1_1.2 D33_2_1.1 D33_2_1.2 D33_2_1_1.1 D33_2_1_1.2 D33_3.1 D33_3.2 D33_3_1.1 D33_3_1.2 D34_1_1.1 D34_1_1.2 D34_1_1_1.1 D34_1_1_1.2 D34_2_1.1 D34_2_1.2 D34_2_1_1.1 D34_2_1_1.2 D34_3.1 D34_3.2 D34_3_1.1 D34_3_1.2 D35_1_1.1 D35_1_1.2 D35_1_1_1.1 D35_1_1_1.2 D35_2_1.1 D35_2_1.2 D35_2_1_1.1 D35_2_1_1.2 D35_3.1 D35_3.2 D35_3_1.1 D35_3_1.2 D36_1_1.1 D36_1_1.2 D36_1_1_1.1 D36_1_1_1.2 D36_2.1 D36_2.2 D36_2_1.1 D36_2_1.2 D37_1_1.1 D37_1_1.2 D37_1_1_1.1 D37_1_1_1.2 D37_2.1 D37_2.2 D37_2_1.1 D37_2_1.2 Designator21.1 Designator21.2 Designator22.1 Designator22.2 Designator23.1 Designator23.2 Designator45.1 Designator45.2 Designator45.3 Designator45.4 Designator45.5 Designator45.6 Designator45.7 Designator45.8 Designator45.9 Designator45.10 L4.1 L4.2 LM1.0 LM1.1 LM1.2 LM1.3 LM1.4 LM2.0 LM2.1 LM2.2 LM2.3 LM2.4 LM2.5 M1.0 M1.1 M1.2 M1.3 M1.4 M1.5 M1.6 M1.7 M1.8 M1.9 M1.10 M1.11 M1.14 M1.15 M1.16 M1.17 M1.18 M1.19 M1.20 M1.21 M1.22 M1.23 M1.24 M1.25 M1_1.0 M1_1.1 M1_1.2 M1_1.3 M1_1.4 M1_1.5 M1_1.6 M1_1.7 M1_1.8 M1_1.9 M1_1.10 M1_1.11 M1_1.14 M1_1.15 M1_1.16 M1_1.17 M1_1.18 M1_1.19 M1_1.20 M1_1.21 M1_1.22 M1_1.23 M1_1.24 M1_1.25 Op31_1_1_1_1.0 Op31_1_1_1_1.1 Op31_1_1_1_1.2 Op31_1_1_1_1.3 Op31_1_1_1_1_1.0 Op31_1_1_1_1_1.1 Op31_1_1_1_1_1.2 Op31_1_1_1_1_1.3 Op31_1_1_2_1.0 Op31_1_1_2_1.1 Op31_1_1_2_1.2 Op31_1_1_2_1.3 Op31_1_1_2_1_1.0 Op31_1_1_2_1_1.1 Op31_1_1_2_1_1.2 Op31_1_1_2_1_1.3 Op31_1_1_3.0 Op31_1_1_3.1 Op31_1_1_3.2 Op31_1_1_3.3 Op31_1_1_3_1.0 Op31_1_1_3_1.1 Op31_1_1_3_1.2 Op31_1_1_3_1.3 Op31_1_2.0 Op31_1_2.1 Op31_1_2.2 Op31_1_2.3 Op31_1_2_1.0 Op31_1_2_1.1 Op31_1_2_1.2 Op31_1_2_1.3 Op31_2_1_1.0 Op31_2_1_1.1 Op31_2_1_1.2 Op31_2_1_1.3 Op31_2_1_1_1.0 Op31_2_1_1_1.1 Op31_2_1_1_1.2 Op31_2_1_1_1.3 Op31_2_2_1.0 Op31_2_2_1.1 Op31_2_2_1.2 Op31_2_2_1.3 Op31_2_2_1_1.0 Op31_2_2_1_1.1 Op31_2_2_1_1.2 Op31_2_2_1_1.3 Op31_2_3.0 Op31_2_3.1 Op31_2_3.2 Op31_2_3.3 Op31_2_3_1.0 Op31_2_3_1.1 Op31_2_3_1.2 Op31_2_3_1.3 Op31_3.0 Op31_3.1 Op31_3.2 Op31_3.3 Op31_3_1.0 Op31_3_1.1 Op31_3_1.2 Op31_3_1.3 Op32_1_1_1_1.0 Op32_1_1_1_1.1 Op32_1_1_1_1.2 Op32_1_1_1_1.3 Op32_1_1_1_1_1.0 Op32_1_1_1_1_1.1 Op32_1_1_1_1_1.2 Op32_1_1_1_1_1.3 Op32_1_1_2_1.0 Op32_1_1_2_1.1 Op32_1_1_2_1.2 Op32_1_1_2_1.3 Op32_1_1_2_1_1.0 Op32_1_1_2_1_1.1 Op32_1_1_2_1_1.2 Op32_1_1_2_1_1.3 Op32_1_1_3.0 Op32_1_1_3.1 Op32_1_1_3.2 Op32_1_1_3.3 Op32_1_1_3_1.0 Op32_1_1_3_1.1 Op32_1_1_3_1.2 Op32_1_1_3_1.3 Op32_1_2.0 Op32_1_2.1 Op32_1_2.2 Op32_1_2.3 Op32_1_2_1.0 Op32_1_2_1.1 Op32_1_2_1.2 Op32_1_2_1.3 Op32_2_1_1.0 Op32_2_1_1.1 Op32_2_1_1.2 Op32_2_1_1.3 Op32_2_1_1_1.0 Op32_2_1_1_1.1 Op32_2_1_1_1.2 Op32_2_1_1_1.3 Op32_2_2_1.0 Op32_2_2_1.1 Op32_2_2_1.2 Op32_2_2_1.3 Op32_2_2_1_1.0 Op32_2_2_1_1.1 Op32_2_2_1_1.2 Op32_2_2_1_1.3 Op32_2_3.0 Op32_2_3.1 Op32_2_3.2 Op32_2_3.3 Op32_2_3_1.0 Op32_2_3_1.1 Op32_2_3_1.2 Op32_2_3_1.3 Op32_3.0 Op32_3.1 Op32_3.2 Op32_3.3 Op32_3_1.0 Op32_3_1.1 Op32_3_1.2 Op32_3_1.3 R34_2.1 R34_2.2 R34_2_1.1 R34_2_1.2 R36_1_1.1 R36_1_1.2 R36_1_1_1.1 R36_1_1_1.2 R36_2.1 R36_2.2 R36_2_1.1 R36_2_1.2 R38_1_1.1 R38_1_1.2 R38_1_1_1.1 R38_1_1_1.2 R38_2.1 R38_2.2 R38_2_1.1 R38_2_1.2 R40_1_1.1 R40_1_1.2 R40_1_1_1.1 R40_1_1_1.2 R40_2.1 R40_2.2 R40_2_1.1 R40_2_1.2 R42_1_1.1 R42_1_1.2 R42_1_1_1.1 R42_1_1_1.2 R42_2.1 R42_2.2 R42_2_1.1 R42_2_1.2 R44_1_1_1.1 R44_1_1_1.2 R44_2.1 R44_2.2 R44_2_1.1 R44_2_1.2 R46_1_1.1 R46_1_1.2 R46_1_1_1.1 R46_1_1_1.2 R46_1_2.1 R46_1_2.2 R46_1_3.1 R46_1_3.2 R46_2.1 R46_2.2 R46_2_1.1 R46_2_1.2 R48_1_1_1.1 R48_1_1_1.2 R48_2.1 R48_2.2 R48_2_1.1 R48_2_1.2 R50_2.1 R50_2.2 R50_2_1.1 R50_2_1.2 R52_2.1 R52_2.2 R52_2_1.1 R52_2_1.2 R54_1_1.1 R54_1_1.2 R54_1_1_1.1 R54_1_1_1.2 R54_2.1 R54_2.2 R54_2_1.1 R54_2_1.2 R56_1_1.1 R56_1_1.2 R56_1_1_1.1 R56_1_1_1.2 R56_2.1 R56_2.2 R56_2_1.1 R56_2_1.2 R58_1_1.1 R58_1_1.2 R58_2.1 R58_2.2 R58_2_1.1 R58_2_1.2 R60_1_1.1 R60_1_1.2 R60_1_1_1.1 R60_1_1_1.2 R60_2.1 R60_2.2 R60_2_1.1 R60_2_1.2 R62_1_1.1 R62_1_1.2 R62_1_1_1.1 R62_1_1_1.2 R62_2.1 R62_2.2 R62_2_1.1 R62_2_1.2 R64_1_1.1 R64_1_1.2 R64_1_1_1.1 R64_1_1_1.2 R64_2.1 R64_2.2 R64_2_1.1 R64_2_1.2 Rpt1.1 Rpt1.2 Rpt1.3 Rpt2.1 Rpt2.2 Rpt2.3 RT1.1 RT1.2 RT3.1 RT3.2